# Allegro board SATROT-2-IMU-4.brd
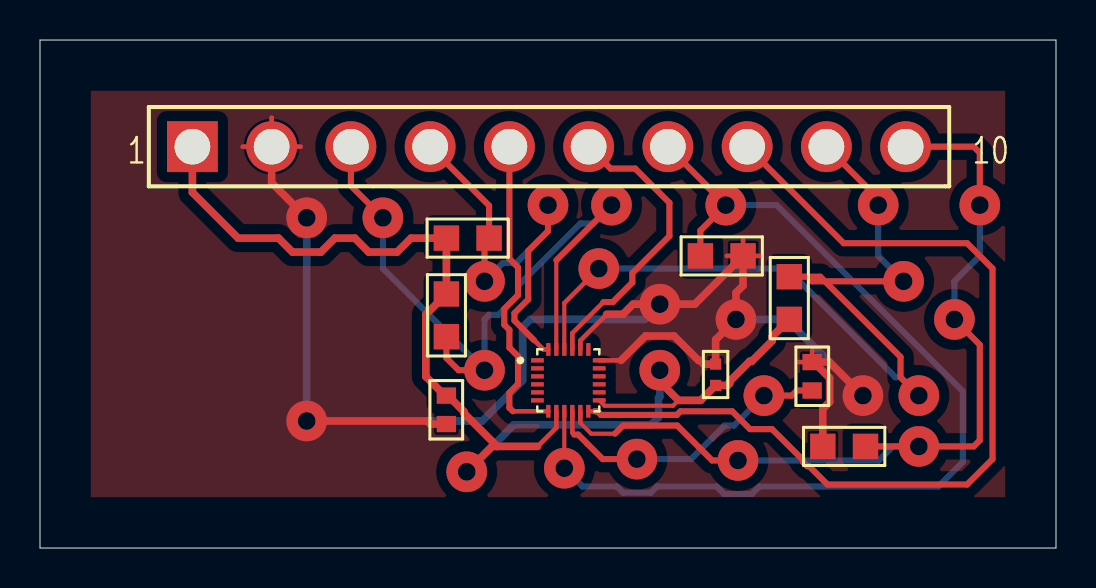
[diagram p0: board, top side]
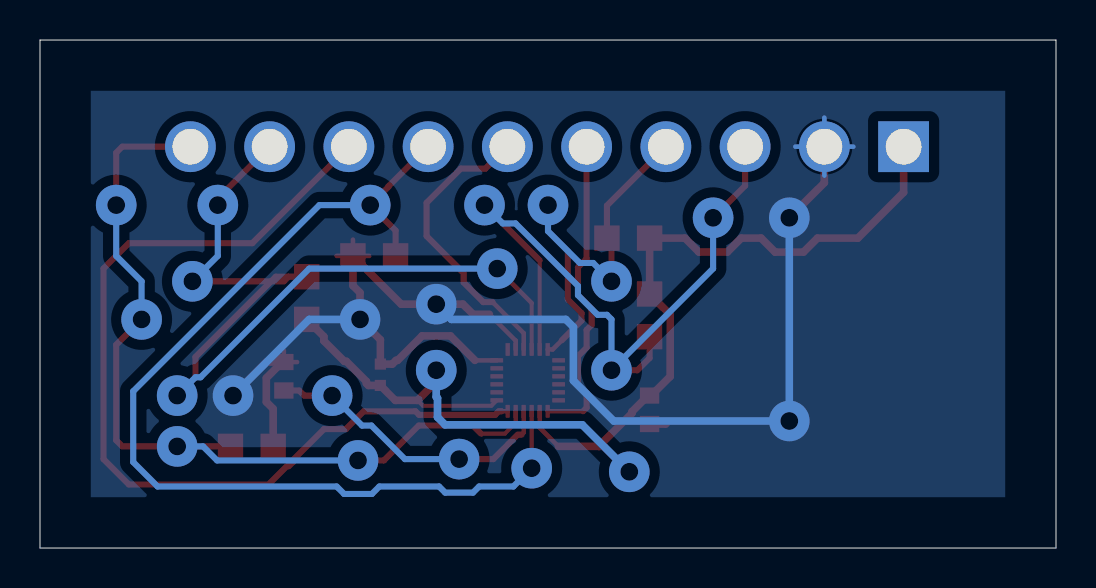
[diagram p1: board, bottom side, seen from below]

Outline 50.8 x 25.4 mm; copper layers: TOP, BOTTOM. Coordinates in mm from the lower left corner of the outline.
Outline path: 0,25.4 50.8,25.4 50.8,0 0,0 0,25.4

## Design rules (mm)
constraint set DEFAULT: min track width 0.203
nets with their own width: min track width 0.229; nets 3V3 GND

## Placement (name value [footprint] x y rotation side)
C11  0.1uF  [SMC0603]  38.61 7.87 90 top
C12  0.01uF/10000pF  [SMC0402]  33.78 8.13 90 top
C13  0.1uF  [SMC0603]  20.32 7.62 270 top
J9  IMU pins  [BLKCON156VHTM1SQSW15610]  7.62 20.07 0 top
R21  10K  [SMR0805]  20.32 12.7 270 top
R22  10K  [SMR0805]  20.32 15.49 0 top
R23  10K  [SMR0805]  37.47 11.43 90 top
R24  10K  [SMR0805]  33.02 14.61 0 top
R25  10K  [SMR0805]  41.27 5.08 180 top
U3  MPU-9250  [QFN40P300X300X105-24N]  26.42 8.38 0 top

## Library data of the parts
C11-C13 = CAP NP
J9 = CON10
R21-R25 = R
U3 = MPU-9250

## Footprints (pads in the part's own frame, mm; a bottom-side part is the same pattern mirrored in y, then rotated)
BLKCON156VHTM1SQSW15610
  rect 2.54x2.54 hole 1.778: 1(0,0)
  round 2.54 hole 1.778: 2(3.962,0) 3(7.925,0) 4(11.887,0) 5(15.85,0) 6(19.812,0) 7(23.774,0) 8(27.737,0) 9(31.699,0) 10(35.662,0)
QFN40P300X300X105-24N
  custom 0.64x0.22 smd: 1(-1.545,1) 2(-1.545,0.6) 3(-1.545,0.2) 4(-1.545,-0.2) 5(-1.545,-0.6) 6(-1.545,-1) 13(1.545,-1) 14(1.545,-0.6) 15(1.545,-0.2) 16(1.545,0.2) 17(1.545,0.6) 18(1.545,1)
  custom 0.22x0.64 smd: 7(-1,-1.545) 8(-0.6,-1.545) 9(-0.2,-1.545) 10(0.2,-1.545) 11(0.6,-1.545) 12(1,-1.545) 19(1,1.545) 20(0.6,1.545) 21(0.2,1.545) 22(-0.2,1.545) 23(-0.6,1.545) 24(-1,1.545)
SMC0402
  rect 0.559x0.559 smd: 1(0,0) 2(1.067,0)
SMC0603
  rect 0.813x0.965 smd: 1(0,0) 2(1.422,0)
SMR0805
  rect 1.27x1.27 smd: 1(0,0) 2(2.134,0)

## Nets
3V3: C12.1 C13.1 J9.1 R21.1 R22.1 R23.1 U3.1 U3.8(VDDIO) U3.13
GND: C11.2 C12.2 C13.2 J9.2 R24.2 R25.2 U3.18 U3.20
N11056: J9.3 R21.2 U3.23
N11068: J9.4 R22.2 U3.24
N11080: J9.5 U3.7
N11122: J9.6 U3.21
N11138: J9.7 R24.1 U3.9
N11163: J9.8 U3.12
N11188: J9.9 R23.2 U3.22
N11206: J9.10 R25.1 U3.11
N11441: C11.1 U3.10

Pads without a net: U3 2 3 4 5 6 14 15 16 17 19

## Via types
v1: diameter 2.032, hole 0.889, TOP to BOTTOM, 24 vias

## Routing (per net, layer and track width the routed paths; a pad name or vN(x,y) marks a point on that pad's centre or on a via; arc(x,y) is an arc through that point)
3V3: length 62.3
  TOP w0.203: 31.92,7.38 31.65,7.11 28.23,7.11 U3.13
  TOP w0.229: U3.8 25.82,6.02 24.88,5.08
  TOP w0.381: v1(21.34,3.81) 22.61,5.08 22.86,5.08 ; 22.86,5.08 24.88,5.08 ; 22.86,5.08 21.2,6.74 21.2,6.82 20.4,7.62 C13.1 20.24,7.62 19.29,8.57 19.29,11.67 R21.1 R22.1 18.55,15.49 17.86,14.8 16.43,14.8 15.74,15.49 14.74,15.49 14.05,14.8 12.62,14.8 11.93,15.49 9.91,15.49 7.62,17.78 J9.1 ; v1(30.99,8.89) 30.99,8.32 31.92,7.38 33.04,7.38 C12.1 34.38,8.13 34.48,8.23 34.48,8.33 35.48,9.33 35.59,9.33 36.61,10.35 36.61,10.57 R23.1
  BOTTOM w0.381: v1(30.99,8.89) 30.99,7.56 30.92,7.49 30.92,6.54 30.54,6.16 23.69,6.16 v1(21.34,3.81)
GND: length 96
  TOP w0.229: J9.2 11.58,21.51 ; J9.2 10.13,20.07 ; J9.2 13.03,20.07 ; 37.95,9.3 C11.2 38.61,9.88 ; R24.2 35.15,15.42 ; R24.2 35.97,14.61 ; R24.2 34.34,14.61 ; 28.33,11.68 27.02,10.37 U3.20 ; 29.06,9.38 U3.18
  TOP w0.381: J9.2 11.58,18.26 v1(13.34,16.51) ; 38.68,9.3 C11.2 ; 38.68,9.3 39.48,8.5 39.48,7.3 39.14,6.96 R25.2 ; 38.68,9.3 39.47,9.3 v1(41.15,7.62) ; 28.33,11.68 29.15,11.68 29.65,12.19 v1(30.99,12.19) 32.74,12.19 R24.2 35.15,13.12 34.8,12.76 v1(34.8,11.43) 33.78,10.41 C12.2 33.19,9.19 33,9.38 32.92,9.38 31.7,10.6 30.28,10.6 29.06,9.38 ; v1(13.34,6.35) 19.37,6.35 19.52,6.2 C13.2
  BOTTOM w0.229: J9.2 11.58,21.51 ; J9.2 11.58,18.62 ; J9.2 13.03,20.07 ; J9.2 10.13,20.07
  BOTTOM w0.381: v1(34.8,11.43) 37.34,11.43 v1(41.15,7.62) ; v1(30.99,12.19) 30.23,11.43 24.51,11.43 24.13,11.05 24.13,8.37 22.11,6.35 v1(13.34,6.35) v1(13.34,16.51)
N11056: length 37.1
  TOP w0.203: 25.82,14.39 U3.23
  TOP w0.305: J9.3 15.54,18.11 v1(17.14,16.51) ; R21.2 20.32,9.5 20.93,8.89 v1(22.23,8.89) ; v1(28.57,17.14) 25.82,14.39
  BOTTOM w0.305: v1(28.57,17.14) 27.66,16.23 27.02,16.23 23.9,13.11 23.9,12.64 22.92,11.66 22.45,11.66 22.23,11.43 v1(22.23,8.89) 17.14,13.97 v1(17.14,16.51)
N11068: length 22.3
  TOP w0.229: 24.71,10.39 25.17,9.93 U3.24
  TOP w0.305: v1(25.4,17.14) 25.4,15.84 24.41,14.85 24.41,12.43 23.72,11.74 23.72,11.37 24.71,10.39 ; J9.4 22.45,17.12 R22.2 22.23,15.27 v1(22.23,13.34)
  BOTTOM w0.305: v1(25.4,17.14) 25.4,15.84 23.81,14.25 23.14,14.25 v1(22.23,13.34)
N11080: length 16
  TOP w0.229: U3.7 23.64,6.84
  TOP w0.305: 23.64,6.84 23.47,7.01 23.47,7.76 23.9,8.2 23.9,9.58 23.47,10.02 23.47,10.91 23.22,11.16 23.22,11.95 23.9,12.64 23.9,14.03 23.47,14.46 J9.5
N11122: length 14.8
  TOP w0.229: U3.21 26.62,10.74 28.17,12.29
  TOP w0.305: 28.17,12.29 28.63,12.29 29.62,13.28 29.62,13.74 31.47,15.6 31.47,17.26 29.76,18.97 28.53,18.97 J9.6
N11138: length 50.6
  TOP w0.203: U3.9 v1(26.22,3.99)
  TOP w0.305: R24.1 33.02,15.88 v1(34.29,17.14) 33.37,18.06 33.37,18.09 J9.7
  BOTTOM w0.305: v1(26.22,3.99) 27.13,3.07 28.84,3.07 29.15,2.77 30.54,2.77 30.85,3.07 33.83,3.07 34.2,2.7 35.59,2.7 35.97,3.07 44.92,3.07 46.14,4.3 46.14,7.84 36.83,17.14 v1(34.29,17.14)
N11163: length 46.8
  TOP w0.229: 27.73,6.84 U3.12
  TOP w0.305: J9.8 40.18,15.24 46.35,15.24 47.62,13.97 47.62,4.45 46.35,3.17 39.37,3.17 38.46,4.09 38.36,4.09 38.15,4.3 38.15,4.39 36.6,5.94 35.5,5.94 34.61,6.84 32.03,6.84 31.84,6.65 28.04,6.65 27.86,6.84 27.73,6.84
N11188: length 46.1
  TOP w0.203: U3.22 26.22,12.25
  TOP w0.229: 26.22,12.25 v1(27.94,13.97)
  TOP w0.305: 38.38,13.56 R23.2 ; 38.38,13.56 38.61,13.34 v1(43.18,13.34) ; 38.38,13.56 39.01,13.56 43.03,9.55 43.03,8.54 v1(43.94,7.62) ; v1(41.91,17.14) 41.91,17.48 J9.9
  BOTTOM w0.305: v1(43.94,7.62) 43.03,8.54 42.77,8.54 37.34,13.97 v1(27.94,13.97) ; v1(41.91,17.14) 41.91,14.61 v1(43.18,13.34)
N11206: length 44
  TOP w0.203: 27.02,6.26 27.56,5.71 28.74,5.71
  TOP w0.229: U3.11 27.02,6.26
  TOP w0.305: J9.10 46.69,20.07 46.99,19.76 v1(46.99,17.14) ; R25.1 v1(43.94,5.08) 46.69,5.08 46.99,5.38 46.99,10.16 v1(45.72,11.43) ; v1(34.9,4.38) 33.6,4.38 31.86,6.12 29.15,6.12 28.74,5.71
  BOTTOM w0.305: v1(34.9,4.38) 41.95,4.38 42.65,5.08 v1(43.94,5.08) ; v1(46.99,17.14) 46.99,14.61 45.72,13.34 v1(45.72,11.43)
N11441: length 15
  TOP w0.229: U3.10 26.62,5.77 26.72,5.67
  TOP w0.305: 26.72,5.67 26.91,5.67 27.37,5.21 28.13,4.45 v1(29.84,4.45) ; C11.1 37.85,7.87 37.59,7.62 v1(36.2,7.62)
  BOTTOM w0.305: v1(29.84,4.45) 32.55,4.45 34.23,6.12 34.7,6.12 v1(36.2,7.62)

## Copper pours and planes (outline as drawn; the poured copper is in the pictures)
GND on TOP, BOTTOM: 2.54,22.86 48.26,22.86 48.26,2.54 2.54,2.54
